# Altium PCB USB下载线mega8贴片.PcbDoc
Units mm, origin at the board's own origin, x right, y up, seen from the top; angles counter-clockwise.
Board outline 152.4 x 101.6 mm, 2 copper layers (Top Layer, Bottom Layer); 19 components, 22 nets, 80 pads, 8 vias.
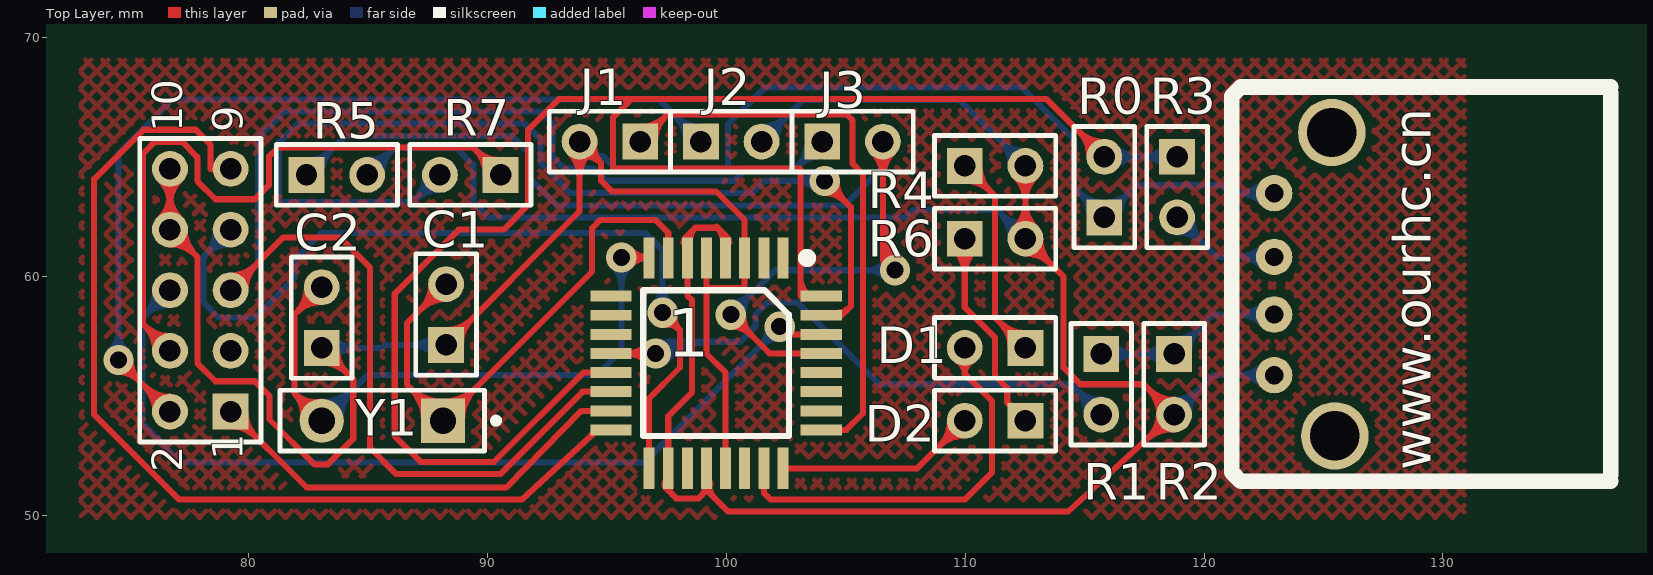
[diagram p0: Top Layer view]
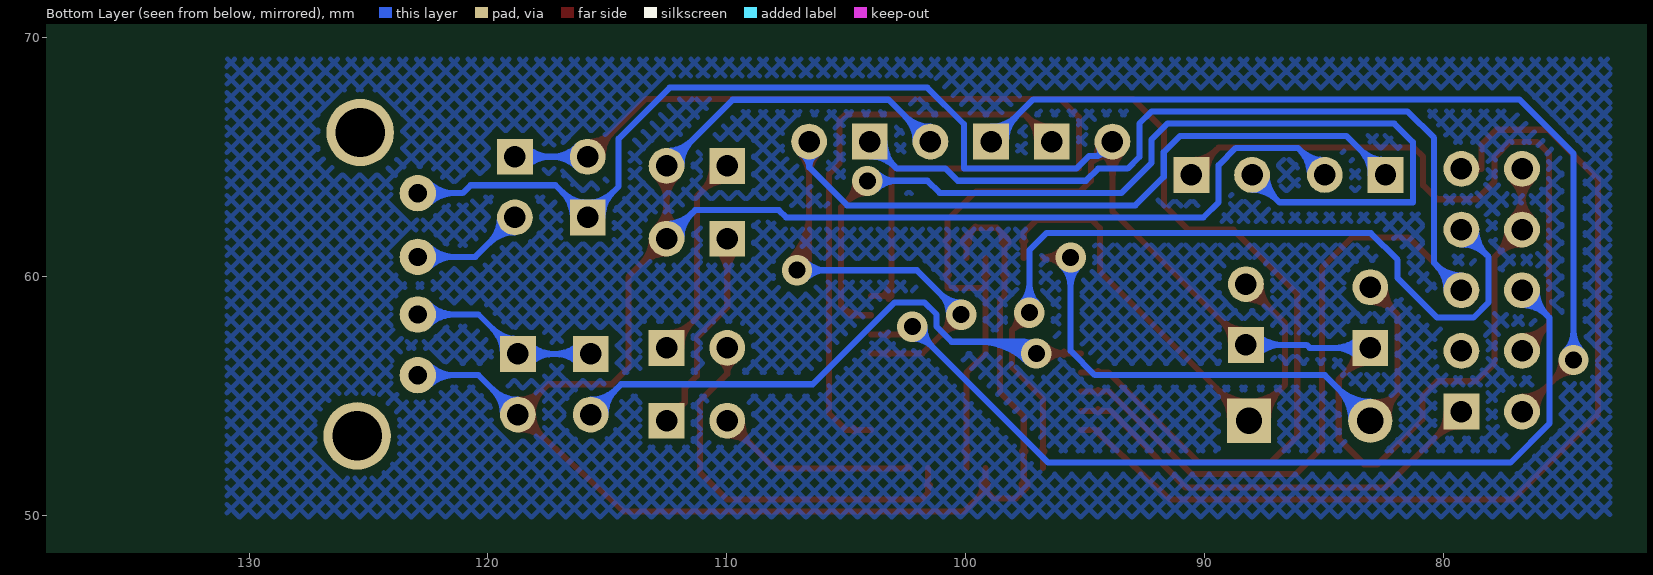
[diagram p1: Bottom Layer view, seen from below]

## Layer stack, top to bottom
Top Layer: signal copper 0.0356
Dielectric: dielectric 0.32, FR-4, Dk 4.8
Bottom Layer: signal copper 0.0356

## Board outline
25.4,25.4 177.8,25.4 177.8,127 25.4,127

## Design rules (kind name [scope] priority, off if disabled: settings)
Clearance [All] p1: gap=0.254
ComponentClearance [All] p1: gap=0.254 collisioncheckmode=3 verticalgap=0.254
PolygonConnect [All] p1: connectstyle=Relief reliefconductorwidth=0.254 reliefentries=4 polygonreliefangle="90 Angle"
RoutingVias [All] p1: holewidth=0.711 width=1.27 viastyle="Through Hole" minholewidth=0.711 minwidth=1.27 maxholewidth=0.711 maxwidth=1.27
SolderMaskExpansion [All] p1: expansion=0.102
TestPointUsage [All] p1: valid=0 allowmultiple=FALSE
Testpoint [All] p1: side=15 testpointundercomponent=TRUE minsize=1.016 maxsize=2.54 preferedsize=1.524 minholesize=0 maxholesize=1.016 preferedholesize=0.813 testpointgrid=0.025 style=1023 order=0123456789
Width [All] p1: maxlimit=0.254 minlimit=0.254 preferedwidth=0.254
17 further rules are at their usual default settings.

## Classes and differential pairs
component class mage8贴片: C1 C2 D1 D2

## Components (designator, comment, footprint, x,y, rotation, side; value= is the part's Value field where it differs from the comment)
C1 "" HDR1X2 88.265,57.15 r90 top
C2 "" HDR1X2 83.058,57.023 r90 top
D1 "" HDR1X2 112.522,57.023 r180 top
D2 "" HDR1X2 112.522,53.975 r180 top
ISP "" HDR2X5 79.248,54.356 r90 top
J1 "CON2" HDR1X2 96.393,65.659 r180 top
J2 "CON2" HDR1X2 98.933,65.659 r0 top
J3 "CON2" HDR1X2 104.013,65.659 r0 top
JP1 "4 HEADER" USB 122.936,60.96 r90 top
mega8 "贴片" TQFP-32_0.8/7×7mm 99.568,56.388 r270 top
R0 "" HDR1X2 115.824,62.484 r90 top
R1 "" HDR1X2 115.697,56.769 r270 top
R2 "" HDR1X2 118.745,56.769 r270 top
R3 "" HDR1X2 118.872,65.024 r270 top
R4 "" HDR1X2 109.982,64.643 r0 top
R5 "" HDR1X2 82.423,64.262 r0 top
R6 "" HDR1X2 109.982,61.595 r0 top
R7 "" HDR1X2 90.551,64.262 r180 top
Y1 "XTAL" SPST-2 85.598,53.975 r180 top

## Footprints (in the part's own frame and the unit in brackets; to place one, negate y for a bottom-side part, rotate by r counter-clockwise, add the part's x,y. Pads: shape width x height; smd on the part's side, far side on the other; paste and mask are expansions set on the pad)
HDR1X2 [mm] "Connector; Header; 2 Position"
  rect 1.5x1.5 hole 0.9: 1(0,0)
  round 1.5 hole 0.9: 2(2.54,0)
  silkscreen extent -1.27,-1.27 3.81,1.27
HDR2X5 [mm] "Connector; Header; 5x2 Position"
  rect 1.5x1.5 hole 0.9: 1(0,0)
  round 1.5 hole 0.9: 2(0,2.54) 3(2.54,0) 4(2.54,2.54) 5(5.08,0) 6(5.08,2.54) 7(7.62,0) 8(7.62,2.54) 9(10.16,0) 10(10.16,2.54)
  silkscreen extent -1.27,-1.27 11.43,3.81
SPST-2 [mm] "Circuit Breaker; 2 Leads"
  rect 1.85x1.85 hole 1.1: 1(-2.54,0)
  round 1.85 hole 1.1: 2(2.54,0)
  silkscreen extent -4.89,-1.27 4.28,1.27
TQFP-32_0.8/7×7mm [mm] "引脚间距：0.8mm，长度 ：1mm 。主体外形 7×7mm，方形，边角索引"
  rect 1.727x0.457 smd: 1(-4.4,2.8) 2(-4.4,2) 3(-4.4,1.2) 4(-4.4,0.4) 5(-4.4,-0.4) 6(-4.4,-1.2) 7(-4.4,-2) 8(-4.4,-2.8) 17(4.4,-2.8) 18(4.4,-2) 19(4.4,-1.2) 20(4.4,-0.4) 21(4.4,0.4) 22(4.4,1.2) 23(4.4,2) 24(4.4,2.8)
  rect 0.457x1.727 smd: 9(-2.8,-4.4) 10(-2,-4.4) 11(-1.2,-4.4) 12(-0.4,-4.4) 13(0.4,-4.4) 14(1.2,-4.4) 15(2,-4.4) 16(2.8,-4.4) 25(2.8,4.4) 26(2,4.4) 27(1.2,4.4) 28(0.4,4.4) 29(-0.4,4.4) 30(-1.2,4.4) 31(-2,4.4) 32(-2.8,4.4)
  silkscreen extent -4.53,-3.05 3.05,3.94
USB [mil]
  round 111.18 hole 81.18: 0(-300,-100) 0(200,-95)
  round 60 hole 30: 1(-200,0) 2(-100,0) 3(-5,0) 4(100,0)
  silkscreen extent -375,-555 275,70

## Part data
C1 C2: library part CAPSMD, "Capacitor SMD1206"
D1: library part "LED Zöld", "Zöld Led 3mm"
D2: library part "LED Piros", "Piros Led 3mm"
ISP: library part MLW10A, "Header, 5-Pin, Dual row, Right Angle"
J1 J2 J3: "Connector"
JP1: "4 Pin Header"
mega8: library part ATmega8-A, "8 位微处理器/32引脚"
R0 R1 R2 R3 R4 R5 R6 R7: library part RES, "Resistor SMD1206, 1% fémréteg"
Y1: "Crystal Oscillator"

## Via types
v1: diameter 1.27, hole 0.711, Top Layer to Bottom Layer, 8 vias

## Nets (pads, with @x,y where several pads share a name; then routed paths per layer and width w, separated by ;. In a path a pad name is that pad's centre, name@x,y a point inside that pad or via, vN(x,y) a via of type N, cw(c..) or ccw(c..) an arc to the next point about the centre after c; other vN are vias at no path point)
GND: C1.1 C2.1 ISP.8 ISP.10 J1.2 JP1.4 mega8.3 mega8.5 mega8.21 R0.1 | length 143.4
  Top Layer w0.254: ISP.8@76.267,62.417 ccw(c75.204,63.48) 76.708,63.48 ccw(c78.212,63.48) ISP.8@77.149,62.417 ; ISP.10@76.267,64.075 cw(c75.204,63.012) 76.708,63.012 cw(c78.212,63.012) ISP.10@77.149,64.075 ; ISP.8@76.447,62.237 ccw(c75.817,62.867) 76.708,62.867 ccw(c77.599,62.867) ISP.8@76.969,62.237 ; ISP.10@76.447,64.255 cw(c75.817,63.625) 76.708,63.625 cw(c77.599,63.625) ISP.10@76.969,64.255 ; ISP.8@76.708,61.353 cw(c76.708,59.849) 77.772,60.912 cw(c78.835,61.976) ISP.8@77.331,61.976 ; ISP.8@76.708,61.607 cw(c76.708,60.716) 77.338,61.346 cw(c77.968,61.976) ISP.8@77.077,61.976 ; ISP.10 ISP.8 77.851,60.833 77.851,56.388 78.613,55.626 80.264,55.626 80.874,55.016 80.874,54.026 82.753,52.146 83.312,52.146 84.379,53.213 84.379,55.702 C2.1 ; C2.1@83.058,56.4 cw(c83.058,54.896) 84.122,55.959 cw(c85.185,57.023) C2.1@83.681,57.023 ; C2.1@83.058,56.654 cw(c83.058,55.763) 83.688,56.393 cw(c84.318,57.023) C2.1@83.427,57.023 ; C1.1 93.853,62.738 J1.2 94.754,64.758 ; C1.1@88.265,57.519 ccw(c88.265,58.41) 88.895,57.78 ccw(c89.525,57.15) C1.1@88.634,57.15 ; C1.1@88.265,57.773 ccw(c88.265,59.277) 89.329,58.214 ccw(c90.392,57.15) C1.1@88.888,57.15 ; J1.2@93.412,65.218 cw(c92.349,64.155) 93.853,64.155 cw(c95.357,64.155) J1.2@94.294,65.218 ; J1.2@93.592,65.398 cw(c92.962,64.768) 93.853,64.768 cw(c94.744,64.768) J1.2@94.114,65.398 ; J1.2@93.899,65.293 cw(c93.971,64.71) 94.387,65.125 cw(c94.802,65.541) J1.2@94.219,65.613 ; J1.2@93.93,65.041 cw(c94.053,64.057) 94.754,64.758 ; J1.2@94.471,65.582 ccw(c95.455,65.459) 94.754,64.758 ; mega8.5@99.096,60.081 cw(c98.923,59.908) 99.168,59.908 cw(c99.413,59.908) mega8.5@99.24,60.081 ; mega8.5 99.168,59.538 ; mega8.21@99.896,52.695 ccw(c99.723,52.868) 99.968,52.868 ccw(c100.213,52.868) mega8.21@100.04,52.695 ; mega8.21 99.968,55.982 99.168,56.782 99.168,59.538 ; mega8.3@100.696,60.081 cw(c100.523,59.908) 100.768,59.908 cw(c101.013,59.908) mega8.3@100.84,60.081 ; mega8.3@100.696,61.495 ccw(c100.523,61.668) 100.768,61.668 ccw(c101.013,61.668) mega8.3@100.84,61.495 ; 94.754,64.758 94.754,64.02 95.198,63.576 99.568,63.576 100.768,62.376 mega8.3 100.768,59.538 99.168,59.538
  Bottom Layer w0.254: C2.1 85.598,57.023 85.725,57.15 C1.1 ; C2.1@83.319,56.762 cw(c83.949,56.132) 83.949,57.023 cw(c83.949,57.914) C2.1@83.319,57.284 ; C2.1@83.499,56.582 cw(c84.562,55.519) 84.562,57.023 cw(c84.562,58.527) C2.1@83.499,57.464 ; C1.1@87.824,56.709 ccw(c86.761,55.646) 86.761,57.15 ccw(c86.761,58.654) C1.1@87.824,57.591 ; C1.1@88.004,56.889 ccw(c87.374,56.259) 87.374,57.15 ccw(c87.374,58.041) C1.1@88.004,57.411 ; J1.2 94.459,65.053 ; J1.2@94.136,65.104 cw(c94.262,64.856) 94.459,65.053 ; J1.2@94.408,65.376 ccw(c94.656,65.25) 94.459,65.053 ; R0.1@115.201,62.484 ccw(c113.697,62.484) 114.76,63.548 ccw(c115.824,64.611) 115.824,63.107 ccw(c115.824,64.611) 116.888,63.548 ccw(c117.951,62.484) R0.1@116.447,62.484 ; R0.1@115.455,62.484 ccw(c114.564,62.484) 115.194,63.114 ccw(c115.824,63.744) 115.824,62.853 ccw(c115.824,63.744) 116.454,63.114 ccw(c117.084,62.484) R0.1@116.193,62.484 ; JP1.4@122.487,63.051 ccw(c121.403,61.967) 121.403,63.5 ccw(c121.403,65.033) JP1.4@122.487,63.949 ; JP1.4@122.667,63.231 ccw(c122.016,62.58) 122.016,63.5 ccw(c122.016,64.42) JP1.4@122.667,63.769 ; JP1.4 121.056,63.5 120.726,63.83 117.17,63.83 R0.1 114.529,63.779 114.529,65.786 112.395,67.92 101.6,67.92 100.076,66.396 100.076,64.528 95.368,64.528 94.844,65.053 94.459,65.053
MISO: ISP.9 mega8.16 | length 42.7
  Top Layer w0.254: 77.089,50.673 73.533,54.229 73.533,64.084 75.604,66.155 77.787,66.155 78.41,65.532 78.41,64.516 ; 77.185,50.673 91.44,50.673 mega8.16@94.634,53.613 ; ISP.9@78.651,64.336 ccw(c78.41,64.264) 78.41,64.516 ; ISP.9@78.651,64.696 cw(c78.41,64.768) 78.41,64.516 ; ISP.9 78.41,64.516 ; 94.298,53.303 ccw(c94.016,53.609) mega8.16@94.431,53.592 ; mega8.16@94.793,53.588 mega8.16
MOSI: ISP.1 mega8.15 | length 22.7
  Top Layer w0.254: ISP.1@79.248,53.733 cw(c79.248,52.229) 80.312,53.292 cw(c81.375,54.356) ISP.1@79.871,54.356 ; ISP.1@79.248,53.987 cw(c79.248,53.096) 79.878,53.726 cw(c80.508,54.356) ISP.1@79.617,54.356 ; ISP.1 82.423,51.181 90.805,51.181 93.929,54.388 mega8.15 ; mega8.15@94.461,54.316 ccw(c94.288,54.143) 94.288,54.388 ccw(c94.288,54.633) mega8.15@94.461,54.46
NetD1_1: D1.1 R4.1 | length 16.2
  Top Layer w0.254: R4.1@109.982,64.02 cw(c109.982,62.516) 111.046,63.579 cw(c112.109,64.643) R4.1@110.605,64.643 ; R4.1@109.982,64.274 cw(c109.982,63.383) 110.612,64.013 cw(c111.242,64.643) R4.1@110.351,64.643 ; R4.1 111.252,63.373 111.252,58.293 D1.1 ; D1.1@111.899,57.023 ccw(c110.395,57.023) 111.458,58.087 ccw(c112.522,59.15) D1.1@112.522,57.646 ; D1.1@112.153,57.023 ccw(c111.262,57.023) 111.892,57.653 ccw(c112.522,58.283) D1.1@112.522,57.392
NetD1_2: D1.2 mega8.23 | length 18.6
  Top Layer w0.254: mega8.23@101.496,51.281 cw(c101.323,51.108) 101.568,51.108 cw(c101.813,51.108) mega8.23@101.64,51.281 ; mega8.23 101.568,50.959 101.854,50.673 109.982,50.673 111.125,51.816 111.125,54.788 109.982,55.931 ; D1.2@109.665,56.487 cw(c109.336,55.931) 109.982,55.931 ; D1.2 109.982,55.931 ; D1.2@110.299,56.487 ccw(c110.628,55.931) 109.982,55.931
NetD2_1: D2.1 R6.1 | length 13.7
  Top Layer w0.254: R6.1@109.541,61.154 cw(c108.478,60.091) 109.982,60.091 cw(c111.486,60.091) R6.1@110.423,61.154 ; R6.1@109.721,61.334 cw(c109.091,60.704) 109.982,60.704 cw(c110.873,60.704) R6.1@110.243,61.334 ; R6.1 109.982,58.725 111.252,57.455 111.252,55.846 111.76,55.338 111.76,54.737 ; D2.1@111.92,54.137 ccw(c111.321,54.298) 111.76,54.737 ; D2.1@112.36,54.577 cw(c112.199,55.176) 111.76,54.737 ; D2.1 111.76,54.737
NetD2_2: D2.2 mega8.24 | length 12.5
  Top Layer w0.254: mega8.24 102.368,51.968 107.975,51.968 D2.2 ; mega8.24@102.44,52.06 ccw(c102.661,52.281) 102.661,51.968 ; D2.2@109.359,53.975 cw(c107.855,53.975) 108.918,52.911 cw(c109.982,51.848) D2.2@109.982,53.352 ; D2.2@109.613,53.975 cw(c108.722,53.975) 109.352,53.345 cw(c109.982,52.715) D2.2@109.982,53.606
NetISP_2: ISP.2 J2.1 | length 49.1
  Top Layer w0.254: v1@74.549,56.007 cw(c74.549,54.781) 75.416,55.648 cw(c76.283,56.515) v1@75.057,56.515 ; v1(74.549,56.515) ISP.2 ; ISP.2@76.085,54.356 ccw(c74.581,54.356) 75.644,55.42 ccw(c76.708,56.483) ISP.2@76.708,54.979 ; ISP.2@76.339,54.356 ccw(c75.448,54.356) 76.078,54.986 ccw(c76.708,55.616) ISP.2@76.708,54.725
  Bottom Layer w0.254: v1@74.19,56.874 ccw(c73.323,57.741) 74.549,57.741 ccw(c75.775,57.741) v1@74.908,56.874 ; v1(74.549,56.515) 74.549,65.151 76.823,67.425 97.167,67.425 J2.1 ; J2.1@98.31,65.659 ccw(c96.806,65.659) 97.869,66.723 ccw(c98.933,67.786) J2.1@98.933,66.282 ; J2.1@98.564,65.659 ccw(c97.673,65.659) 98.303,66.289 ccw(c98.933,66.919) J2.1@98.933,66.028
NetISP_4: ISP.4 R7.1 | length 35.1
  Top Layer w0.254: ISP.4@76.085,56.896 ccw(c74.581,56.896) 75.644,57.96 ccw(c76.708,59.023) ISP.4@76.708,57.519 ; ISP.4@76.339,56.896 ccw(c75.448,56.896) 76.078,57.526 ccw(c76.708,58.156) ISP.4@76.708,57.265 ; ISP.4 75.577,58.027 75.577,65.151 76.073,65.647 77.216,65.647 77.851,65.012 77.851,64.008 78.613,63.246 80.264,63.246 80.848,63.83 80.848,65.024 81.229,65.405 89.408,65.405 R7.1 ; R7.1@89.928,64.262 ccw(c88.424,64.262) 89.487,65.326 ccw(c90.551,66.389) R7.1@90.551,64.885 ; R7.1@90.182,64.262 ccw(c89.291,64.262) 89.921,64.892 ccw(c90.551,65.522) R7.1@90.551,64.631
NetJ1_1: J1.1 mega8.25 | length 28.1
  Top Layer w0.254: J1.1 97.536,66.802 105.029,66.802 105.283,66.548 105.283,64.737 105.721,64.3 105.721,54.286 105.023,53.588 mega8.25 ; J1.1@96.393,66.028 ccw(c96.393,66.919) 97.023,66.289 ccw(c97.653,65.659) J1.1@96.762,65.659 ; J1.1@96.393,66.282 ccw(c96.393,67.786) 97.457,66.723 ccw(c98.52,65.659) J1.1@97.016,65.659 ; mega8.25@104.675,53.516 cw(c104.848,53.343) 104.848,53.588 cw(c104.848,53.833) mega8.25@104.675,53.66
NetJ3_2: J3.2 mega8.29 R5.1 | length 68.1
  Top Layer w0.254: v1@100.187,57.909 cw(c100.187,56.682) 101.054,57.55 cw(c101.921,58.417) v1@100.695,58.417 ; v1(100.187,58.417) 101.815,56.788 mega8.29 ; mega8.29@103.261,56.716 ccw(c103.088,56.543) 103.088,56.788 ccw(c103.088,57.033) mega8.29@103.261,56.86 ; J3.2@106.112,65.218 cw(c105.049,64.155) 106.553,64.155 cw(c108.057,64.155) J3.2@106.994,65.218 ; J3.2@106.292,65.398 cw(c105.662,64.768) 106.553,64.768 cw(c107.444,64.768) J3.2@106.814,65.398 ; 106.553,60.887 ccw(c107.674,60.887) v1@106.881,60.095 ; 106.553,61.501 ccw(c108.287,61.501) v1(107.061,60.274) 106.553,60.782 ; 106.553,62.114 ccw(c108.901,62.114) v1@107.241,60.454 ; 106.553,62.727 ccw(c109.514,62.727) v1@107.42,60.633 ; J3.2 106.553,60.782 ; v1@106.603,60.493 ccw(c106.373,60.603) 106.553,60.782 ; v1@106.842,60.733 cw(c106.733,60.962) 106.553,60.782
  Bottom Layer w0.254: R5.1 84.062,65.901 91.02,65.901 91.706,65.215 91.706,64.181 92.895,62.992 104.966,62.992 106.553,64.579 ; R5.1@82.423,64.631 ccw(c82.423,65.522) 83.053,64.892 ccw(c83.683,64.262) R5.1@82.792,64.262 ; R5.1@82.423,64.885 ccw(c82.423,66.389) 83.487,65.326 ccw(c84.55,64.262) R5.1@83.046,64.262 ; v1(100.187,58.417) 102.044,60.274 v1(107.061,60.274) ; v1@100.187,58.925 ccw(c100.187,60.151) 101.054,59.284 ccw(c101.921,58.417) v1@100.695,58.417 ; J3.2@106.241,65.12 cw(c105.929,64.579) 106.553,64.579 ; J3.2 106.553,64.579 ; v1@106.702,59.915 ccw(c105.835,59.048) 105.835,60.274 ccw(c105.835,61.501) v1@106.702,60.633 ; J3.2@106.865,65.12 ccw(c107.177,64.579) 106.553,64.579
NetJP1_2: JP1.2 R1.1 R2.1 | length 23.1
  Bottom Layer w0.254: R1.1 R2.1 120.396,58.42 JP1.2 ; R1.1@115.958,56.508 cw(c116.588,55.878) 116.588,56.769 cw(c116.588,57.66) R1.1@115.958,57.03 ; R1.1@116.138,56.328 cw(c117.201,55.265) 117.201,56.769 cw(c117.201,58.273) R1.1@116.138,57.21 ; R2.1@118.304,56.328 ccw(c117.241,55.265) 117.241,56.769 ccw(c117.241,58.273) R2.1@118.304,57.21 ; R2.1@118.484,56.508 ccw(c117.854,55.878) 117.854,56.769 ccw(c117.854,57.66) R2.1@118.484,57.03 ; R2.1@118.745,57.138 ccw(c118.745,58.029) 119.375,57.399 ccw(c120.005,56.769) R2.1@119.114,56.769 ; R2.1@118.745,57.392 ccw(c118.745,58.896) 119.809,57.833 ccw(c120.872,56.769) R2.1@119.368,56.769 ; JP1.2@122.487,57.971 ccw(c121.403,56.887) 121.403,58.42 ccw(c121.403,59.953) JP1.2@122.487,58.869 ; JP1.2@122.667,58.151 ccw(c122.016,57.5) 122.016,58.42 ccw(c122.016,59.34) JP1.2@122.667,58.689
NetJP1_3: JP1.3 R3.2 | length 12.4
  Bottom Layer w0.254: R3.2@118.872,61.861 cw(c118.872,60.357) 119.936,61.42 cw(c120.999,62.484) R3.2@119.495,62.484 ; R3.2@118.872,62.115 cw(c118.872,61.224) 119.502,61.854 cw(c120.132,62.484) R3.2@119.241,62.484 ; R3.2 120.523,60.833 JP1.3 ; JP1.3@122.487,60.384 ccw(c121.403,59.3) 121.403,60.833 ccw(c121.403,62.366) JP1.3@122.487,61.282 ; JP1.3@122.667,60.564 ccw(c122.016,59.913) 122.016,60.833 ccw(c122.016,61.753) JP1.3@122.667,61.102
Netmega8_12: mega8.12 R1.2 | length 36.5
  Top Layer w0.254: mega8.12 v1(97.044,56.788) ; mega8.12@95.875,56.716 cw(c96.048,56.543) 96.048,56.788 cw(c96.048,57.033) mega8.12@95.875,56.86 ; v1@96.684,56.429 ccw(c95.817,55.562) 95.817,56.788 ccw(c95.817,58.014) v1@96.684,57.147
  Bottom Layer w0.254: v1@96.864,56.968 cw(c97.619,56.212) 97.619,57.28 ; v1@97.223,56.608 cw(c98.846,54.986) 98.846,57.28 ; v1@97.276,57.24 ccw(c97.378,57.438) 97.536,57.28 ; v1@97.403,56.429 cw(c99.459,54.373) 99.459,57.28 ; v1@97.495,57.02 cw(c97.694,57.123) 97.536,57.28 ; 98.232,57.28 ccw(c98.232,55.599) v1(97.044,56.788) 97.536,57.28 ; R1.2@115.074,54.229 ccw(c113.57,54.229) 114.633,55.293 ccw(c115.697,56.356) R1.2@115.697,54.852 ; R1.2@115.328,54.229 ccw(c114.437,54.229) 115.067,54.859 ccw(c115.697,55.489) R1.2@115.697,54.598 ; R1.2 114.427,55.499 106.401,55.499 102.972,58.928 101.727,58.928 101.219,58.42 101.219,57.912 100.587,57.28 97.536,57.28
PB1: mega8.13 mega8.32 R0.2 R3.1 | length 86.4
  Top Layer w0.254: mega8.13@94.461,55.916 ccw(c94.288,55.743) 94.288,55.988 ccw(c94.288,56.233) mega8.13@94.461,56.06 ; mega8.13 94.012,55.988 90.272,52.248 87.198,52.248 86.118,53.328 86.118,59.297 88.797,61.976 90.678,61.976 91.694,62.992 91.694,66.142 92.989,67.437 96.012,67.437 ; 103.099,59.386 ccw(c103.531,59.386) mega8.32@103.225,59.08 ; 103.099,59.999 ccw(c104.144,59.999) mega8.32@103.405,59.26 ; mega8.32@103.259,59.119 ccw(c103.099,58.968) 103.099,59.188 ; mega8.32@103.259,59.257 cw(c103.099,59.408) 103.099,59.188 ; mega8.32 103.099,59.188 ; R0.2@115.201,65.024 ccw(c113.697,65.024) 114.76,66.088 ccw(c115.824,67.151) R0.2@115.824,65.647 ; R0.2@115.455,65.024 ccw(c114.564,65.024) 115.194,65.654 ccw(c115.824,66.284) R0.2@115.824,65.393 ; R0.2 113.411,67.437 96.012,67.437 ; 96.012,67.437 95.262,66.687 95.262,64.528 103.061,64.528 103.099,64.491 103.099,59.188
  Bottom Layer w0.254: R0.2 R3.1 ; R0.2@116.085,64.763 cw(c116.715,64.133) 116.715,65.024 cw(c116.715,65.915) R0.2@116.085,65.285 ; R0.2@116.265,64.583 cw(c117.328,63.52) 117.328,65.024 cw(c117.328,66.528) R0.2@116.265,65.465 ; R3.1@118.431,64.583 ccw(c117.368,63.52) 117.368,65.024 ccw(c117.368,66.528) R3.1@118.431,65.465 ; R3.1@118.611,64.763 ccw(c117.981,64.133) 117.981,65.024 ccw(c117.981,65.915) R3.1@118.611,65.285
PB6: C1.2 mega8.7 Y1.1 | length 36.6
  Top Layer w0.254: Y1.1@87.34,53.975 ccw(c85.413,53.975) 86.776,55.337 ccw(c88.138,56.7) 88.138,54.773 ccw(c88.138,56.7) 89.5,55.337 ccw(c90.863,53.975) Y1.1@88.936,53.975 ; Y1.1@87.594,53.975 ccw(c86.281,53.975) 87.209,54.904 ccw(c88.138,55.832) 88.138,54.519 ccw(c88.138,55.832) 89.067,54.904 ccw(c89.995,53.975) Y1.1@88.682,53.975 ; C1.2@87.642,59.69 cw(c86.138,59.69) 87.201,58.626 cw(c88.265,57.563) C1.2@88.265,59.067 ; C1.2@87.896,59.69 cw(c87.005,59.69) 87.635,59.06 cw(c88.265,58.43) C1.2@88.265,59.321 ; C1.2 86.626,58.051 86.626,55.487 Y1.1 94.376,60.213 94.376,62.033 94.726,62.382 97.028,62.382 97.568,61.842 mega8.7 ; mega8.7@97.496,61.495 ccw(c97.323,61.668) 97.568,61.668 ccw(c97.813,61.668) mega8.7@97.64,61.495
PB7: C2.2 mega8.8 Y1.2 | length 42
  Top Layer w0.254: Y1.2@82.267,54.08 ccw(c81.04,54.243) 81.915,55.118 ; C2.2@82.435,59.563 cw(c80.931,59.563) 81.994,58.499 cw(c83.058,57.436) C2.2@83.058,58.94 ; Y1.2@82.519,54.046 ccw(c81.682,54.157) 82.279,54.754 ccw(c82.876,55.351) Y1.2@82.987,54.514 ; C2.2@82.689,59.563 cw(c81.798,59.563) 82.428,58.933 cw(c83.058,58.303) C2.2@83.058,59.194 ; Y1.2@82.953,54.766 cw(c82.79,55.993) 81.915,55.118 ; Y1.2 81.915,55.118 ; C2.2 81.915,58.42 81.915,55.118 ; v1(95.606,60.808) mega8.8@96.768,60.808 ; v1@95.978,60.463 cw(c96.768,59.732) mega8.8@96.768,60.808 ; v1@95.978,61.153 ccw(c96.768,61.883) mega8.8@96.768,60.808 ; 96.475,60.808 cw(c96.475,60.495) mega8.8@96.696,60.716 ; mega8.8 mega8.8@96.768,60.808
  Bottom Layer w0.254: Y1.2 84.963,55.88 94.59,55.88 95.606,56.896 v1(95.606,60.808) ; Y1.2@83.058,54.519 ccw(c83.058,55.832) 83.987,54.904 ccw(c84.915,53.975) Y1.2@83.602,53.975 ; Y1.2@83.058,54.773 ccw(c83.058,56.7) 84.42,55.337 ccw(c85.783,53.975) Y1.2@83.856,53.975 ; v1@95.246,60.448 cw(c94.379,59.581) 95.606,59.581 cw(c96.832,59.581) v1@95.965,60.448
PD0: ISP.6 mega8.30 | length 43.7
  Top Layer w0.254: v1(102.235,57.912) 102.559,57.588 mega8.30 ; mega8.30@103.261,57.516 ccw(c103.088,57.343) 103.088,57.588 ccw(c103.088,57.833) mega8.30@103.261,57.66
  Bottom Layer w0.254: ISP.6@76.085,59.436 cw(c74.581,59.436) 75.644,58.372 cw(c76.708,57.309) ISP.6@76.708,58.813 ; ISP.6@76.339,59.436 cw(c75.448,59.436) 76.078,58.806 cw(c76.708,58.176) ISP.6@76.708,59.067 ; ISP.6 75.565,58.293 75.565,53.848 77.191,52.222 96.545,52.222 v1(102.235,57.912) ; v1@101.727,57.912 cw(c100.501,57.912) 101.368,57.045 cw(c102.235,56.178) v1@102.235,57.404
PD1: mega8.31 R7.2 | length 50.7
  Top Layer w0.254: mega8.31 104.826,58.388 105.213,58.775 105.213,62.91 v1(104.115,64.008) ; v1@104.115,63.5 cw(c104.115,62.274) 104.982,63.141 cw(c105.849,64.008) v1@104.623,64.008 ; mega8.31@104.603,58.49 ccw(c104.603,59.273) 105.157,58.719
  Bottom Layer w0.254: R7.2@87.388,64.262 cw(c85.884,64.262) 86.947,63.198 cw(c88.011,62.135) R7.2@88.011,63.639 ; R7.2@87.642,64.262 cw(c86.751,64.262) 87.381,63.632 cw(c88.011,63.002) R7.2@88.011,63.893 ; R7.2 86.868,63.119 81.28,63.119 81.28,65.634 82.055,66.409 91.554,66.409 92.214,65.749 92.214,64.77 93.472,63.512 101.092,63.512 101.6,64.02 104.103,64.02 v1(104.115,64.008) ; 102.859,64.02 cw(c102.859,62.753) v1@103.755,63.649 ; 102.917,64.02 ccw(c102.917,65.205) v1@103.755,64.367 ; 103.472,64.02 cw(c103.472,63.366) v1@103.935,63.828
RESET: ISP.5 J3.1 mega8.14 | length 72.1
  Top Layer w0.254: ISP.5 81.458,61.646 83.82,61.646 85.09,60.376 85.09,52.832 86.182,51.74 90.532,51.74 93.98,55.188 mega8.14 ; ISP.5@79.248,59.805 ccw(c79.248,60.696) 79.878,60.066 ccw(c80.508,59.436) ISP.5@79.617,59.436 ; ISP.5@79.248,60.059 ccw(c79.248,61.563) 80.312,60.5 ccw(c81.375,59.436) ISP.5@79.871,59.436 ; mega8.14@94.461,55.116 ccw(c94.288,54.943) 94.288,55.188 ccw(c94.288,55.433) mega8.14@94.461,55.26
  Bottom Layer w0.254: ISP.5 80.391,60.579 80.391,65.811 81.497,66.917 92.226,66.917 92.722,66.421 92.722,65.024 93.218,64.528 94.456,64.528 94.964,64.02 100.33,64.02 100.838,64.528 102.882,64.528 J3.1 ; ISP.5@79.248,59.805 ccw(c79.248,60.696) 79.878,60.066 ccw(c80.508,59.436) ISP.5@79.617,59.436 ; ISP.5@79.248,60.059 ccw(c79.248,61.563) 80.312,60.5 ccw(c81.375,59.436) ISP.5@79.871,59.436 ; J3.1@103.39,65.659 cw(c101.886,65.659) 102.949,64.595 cw(c104.013,63.532) J3.1@104.013,65.036 ; J3.1@103.644,65.659 cw(c102.753,65.659) 103.383,65.029 cw(c104.013,64.399) J3.1@104.013,65.29
SCK: ISP.7 mega8.17 | length 42.7
  Top Layer w0.254: mega8.17@96.696,52.695 ccw(c96.523,52.868) 96.768,52.868 ccw(c97.013,52.868) mega8.17@96.84,52.695 ; mega8.17 96.768,54.909 98.06,56.2 98.06,57.769 ; v1(97.333,58.496) 98.06,57.769 ; v1@97.4,57.993 cw(c97.504,57.214) 98.06,57.769 ; v1@97.836,58.429 ccw(c98.615,58.325) 98.06,57.769
  Bottom Layer w0.254: ISP.7@78.625,61.976 cw(c77.121,61.976) 78.184,60.912 cw(c79.248,59.849) ISP.7@79.248,61.353 ; ISP.7@78.879,61.976 cw(c77.988,61.976) 78.618,61.346 cw(c79.248,60.716) ISP.7@79.248,61.607 ; ISP.7 78.105,60.833 78.105,58.928 78.74,58.293 80.264,58.293 81.915,59.944 81.915,60.706 83.033,61.824 96.622,61.824 97.333,61.112 v1(97.333,58.496) ; v1@96.974,58.855 ccw(c96.106,59.723) 97.333,59.723 ccw(c98.559,59.723) v1@97.692,58.855
VCC: J2.2 JP1.1 mega8.4 mega8.6 mega8.18 mega8.20 R2.2 R4.2 R5.2 R6.2 | length 150.2
  Top Layer w0.254: mega8.18@97.427,51.412 ccw(c97.656,51.316) mega8.18@97.481,51.141 ; mega8.18@97.496,52.695 ccw(c97.323,52.868) 97.568,52.868 ccw(c97.813,52.868) mega8.18@97.64,52.695 ; mega8.18@97.662,51.314 ccw(c98.034,51.158) 97.749,50.873 ; mega8.6@98.216,61.411 cw(c98.536,61.436) 98.309,61.663 ; mega8.6@98.296,60.081 cw(c98.123,59.908) 98.368,59.908 cw(c98.613,59.908) mega8.6@98.44,60.081 ; mega8.6@98.296,61.495 ccw(c98.123,61.668) 98.368,61.668 ccw(c98.613,61.668) mega8.6@98.44,61.495 ; mega8.6@98.469,61.431 cw(c99.257,61.494) 98.698,62.052 ; 98.987,50.873 ccw(c98.702,51.158) mega8.20@99.074,51.314 ; mega8.20 99.168,51.054 ; mega8.20@99.255,51.141 ccw(c99.08,51.316) mega8.20@99.309,51.412 ; mega8.20@99.27,51.353 ccw(c100.191,51.353) 99.539,50.702 ; 99.583,62.107 cw(c98.899,61.423) mega8.4@99.866,61.423 ; mega8.4@99.896,61.495 ccw(c99.723,61.668) 99.968,61.668 ccw(c100.213,61.668) mega8.4@100.04,61.495 ; mega8.4 99.968,61.722 99.638,62.052 98.698,62.052 ; 100.017,61.673 cw(c99.766,61.423) mega8.4@100.12,61.423 ; R6.2@112.081,62.036 ccw(c111.018,63.099) 112.522,63.099 ccw(c114.026,63.099) R6.2@112.963,62.036 ; R4.2@112.081,64.202 cw(c111.018,63.139) 112.522,63.139 cw(c114.026,63.139) R4.2@112.963,64.202 ; R6.2@112.261,61.856 ccw(c111.631,62.486) 112.522,62.486 ccw(c113.413,62.486) R6.2@112.783,61.856 ; R4.2@112.261,64.382 cw(c111.631,63.752) 112.522,63.752 cw(c113.413,63.752) R4.2@112.783,64.382 ; R6.2@112.522,60.972 cw(c112.522,59.468) 113.586,60.531 cw(c114.649,61.595) R6.2@113.145,61.595 ; R6.2@112.522,61.226 cw(c112.522,60.335) 113.152,60.965 cw(c113.782,61.595) R6.2@112.891,61.595 ; R4.2 R6.2 114.122,59.995 114.122,56.185 114.808,55.499 117.475,55.499 R2.2 ; 117.588,53.192 cw(c118.654,52.033) R2.2@118.719,53.607 ; 117.661,53.26 ccw(c116.691,54.314) R2.2@118.123,54.255 ; 118.039,53.607 cw(c118.69,52.899) R2.2@118.73,53.86 ; 118.112,53.675 ccw(c117.557,54.278) R2.2@118.376,54.244 ; R2.2@118.122,54.229 ccw(c116.618,54.229) 117.681,55.293 ccw(c118.745,56.356) R2.2@118.745,54.852 ; R2.2@118.376,54.229 ccw(c117.485,54.229) 118.115,54.859 ccw(c118.745,55.489) R2.2@118.745,54.598 ; R2.2@118.731,54.244 114.3,50.165 100.076,50.165 99.187,51.054 99.168,51.054 ; 97.568,51.108 cw(c97.813,51.108) 97.64,51.281 ccw(c97.813,51.108) 97.568,51.108 ; 97.568,51.108 ccw(c97.323,51.108) 97.496,51.281 cw(c97.323,51.108) 97.568,51.108 ; 98.698,62.052 98.368,61.722 mega8.6 98.368,59.21 98.568,59.01 98.568,55.157 97.568,54.157 mega8.18 97.568,51.054 97.898,50.724 98.838,50.724 99.168,51.054 ; 99.168,51.108 cw(c99.413,51.108) 99.24,51.281 ccw(c99.413,51.108) 99.168,51.108 ; 99.168,51.108 ccw(c98.923,51.108) 99.096,51.281 cw(c98.923,51.108) 99.168,51.108
  Bottom Layer w0.254: R5.2 86.094,65.393 88.683,65.393 89.408,64.668 89.408,63.119 90.043,62.484 107.518,62.484 107.823,62.789 111.328,62.789 R6.2 ; R5.2@84.963,64.631 ccw(c84.963,65.522) 85.593,64.892 ccw(c86.223,64.262) R5.2@85.332,64.262 ; R5.2@84.963,64.885 ccw(c84.963,66.389) 86.027,65.326 ccw(c87.09,64.262) R5.2@85.586,64.262 ; J2.2 103.226,67.412 109.753,67.412 R4.2 ; J2.2@101.473,66.028 ccw(c101.473,66.919) 102.103,66.289 ccw(c102.733,65.659) J2.2@101.842,65.659 ; J2.2@101.473,66.282 ccw(c101.473,67.786) 102.537,66.723 ccw(c103.6,65.659) J2.2@102.096,65.659 ; R6.2@111.899,61.595 ccw(c110.395,61.595) 111.458,62.659 ccw(c112.522,63.722) R6.2@112.522,62.218 ; R4.2@111.899,64.643 ccw(c110.395,64.643) 111.458,65.707 ccw(c112.522,66.77) R4.2@112.522,65.266 ; R6.2@112.153,61.595 ccw(c111.262,61.595) 111.892,62.225 ccw(c112.522,62.855) R6.2@112.522,61.964 ; R4.2@112.153,64.643 ccw(c111.262,64.643) 111.892,65.273 ccw(c112.522,65.903) R4.2@112.522,65.012 ; R2.2 120.396,55.88 JP1.1 ; R2.2@118.745,54.598 ccw(c118.745,55.489) 119.375,54.859 ccw(c120.005,54.229) R2.2@119.114,54.229 ; R2.2@118.745,54.852 ccw(c118.745,56.356) 119.809,55.293 ccw(c120.872,54.229) R2.2@119.368,54.229 ; JP1.1@122.487,55.431 ccw(c121.403,54.347) 121.403,55.88 ccw(c121.403,57.413) JP1.1@122.487,56.329 ; JP1.1@122.667,55.611 ccw(c122.016,54.96) 122.016,55.88 ccw(c122.016,56.8) JP1.1@122.667,56.149
pads on no net: ISP.3 JP1.0 mega8.1 mega8.2 mega8.9 mega8.10 mega8.11 mega8.19 mega8.22 mega8.26 mega8.27 mega8.28

## Polygon pours and split planes (outlines as drawn)
no net on Top Layer (hatched 45Degree grid 0.508 track 0.203): 72.986,69.088 130.898,69.088 130.898,49.911 72.986,49.911
no net on Bottom Layer (hatched 45Degree grid 0.508 track 0.203): 73.025,69.114 130.937,69.114 130.937,49.937 73.025,49.937

## Silkscreen, mask and mechanical layers (free items; w line width, h text height)
Top Overlay:
  text "www.ourhc.cn" at 129.497,51.907 h1.56 r90
Mechanical 1:
  lines w0.254: 67.955,68.069 68.453,69.596 ; 68.062,51.178 68.58,49.657 ; 68.199,69.594 68.707,69.598 ; 68.326,49.655 68.834,49.659 ; 68.461,68.285 68.453,69.596 ; 68.572,50.968 68.58,49.657 ; 68.971,68.075 68.453,69.596 ; 69.078,51.184 68.58,49.657 ; 72.515,73.787 72.519,74.295 ; 74.038,73.523 72.517,74.041 ; 74.044,74.539 72.517,74.041 ; 93.195,73.907 72.517,74.041 ; 110.767,73.794 131.445,73.66 ; 129.918,73.162 131.445,73.66 ; 129.924,74.178 131.445,73.66 ; 131.443,73.406 131.447,73.914
  lines w0.654: 131.699,69.342 131.699,49.149 72.39,49.276 72.39,69.85 131.699,69.85
  text "58.9292 (mm)" at 93.444,72.992 h1.52 r359.63
  text "19.9394 (mm)" at 67.549,68.025 h1.52 r270.36

## Text inside footprints (layer, text, board x,y; h text height)
ISP: Top Overlay "2" at 77.216,51.816 h1.27 r90; Top Overlay "1" at 79.756,52.324 h1.27 r90; Top Overlay "9" at 79.756,66.04 h1.27 r90; Top Overlay "10" at 77.216,66.04 h1.27 r90
mega8: Top Overlay "1" at 97.536,56.642 h2.03